# Altium PCB LV_Board.PcbDoc
Units mm, origin at the board's own origin, x right, y up, seen from the top; angles counter-clockwise.
Board outline 81.75 x 75.3 mm, 2 copper layers (Top Layer, Bottom Layer); 6 components, 14 nets, 84 pads, 0 vias.
Unrouted connection lines stored in the file: 22.
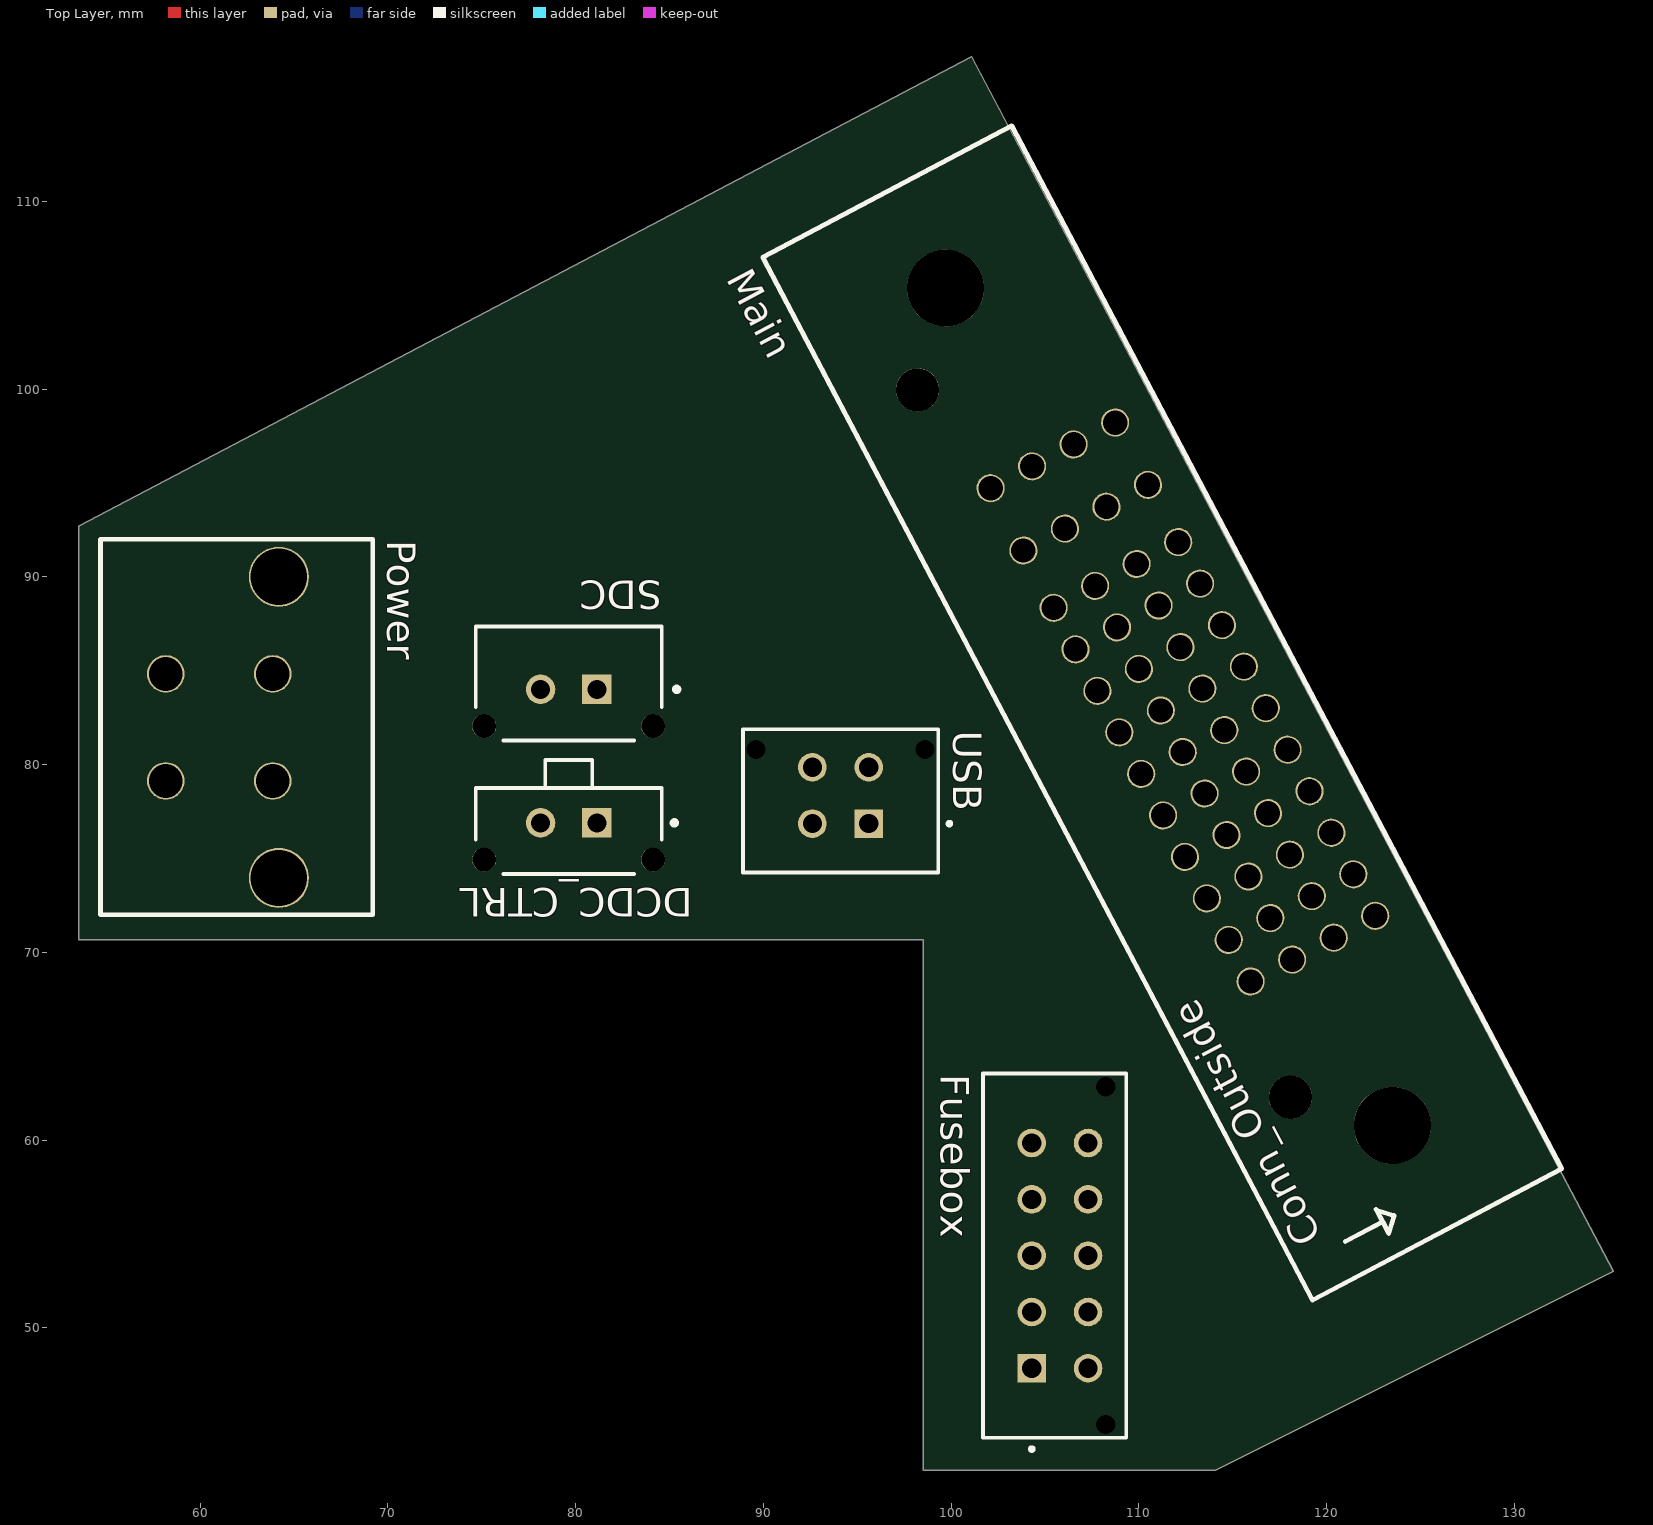
[diagram p0: Top Layer view]
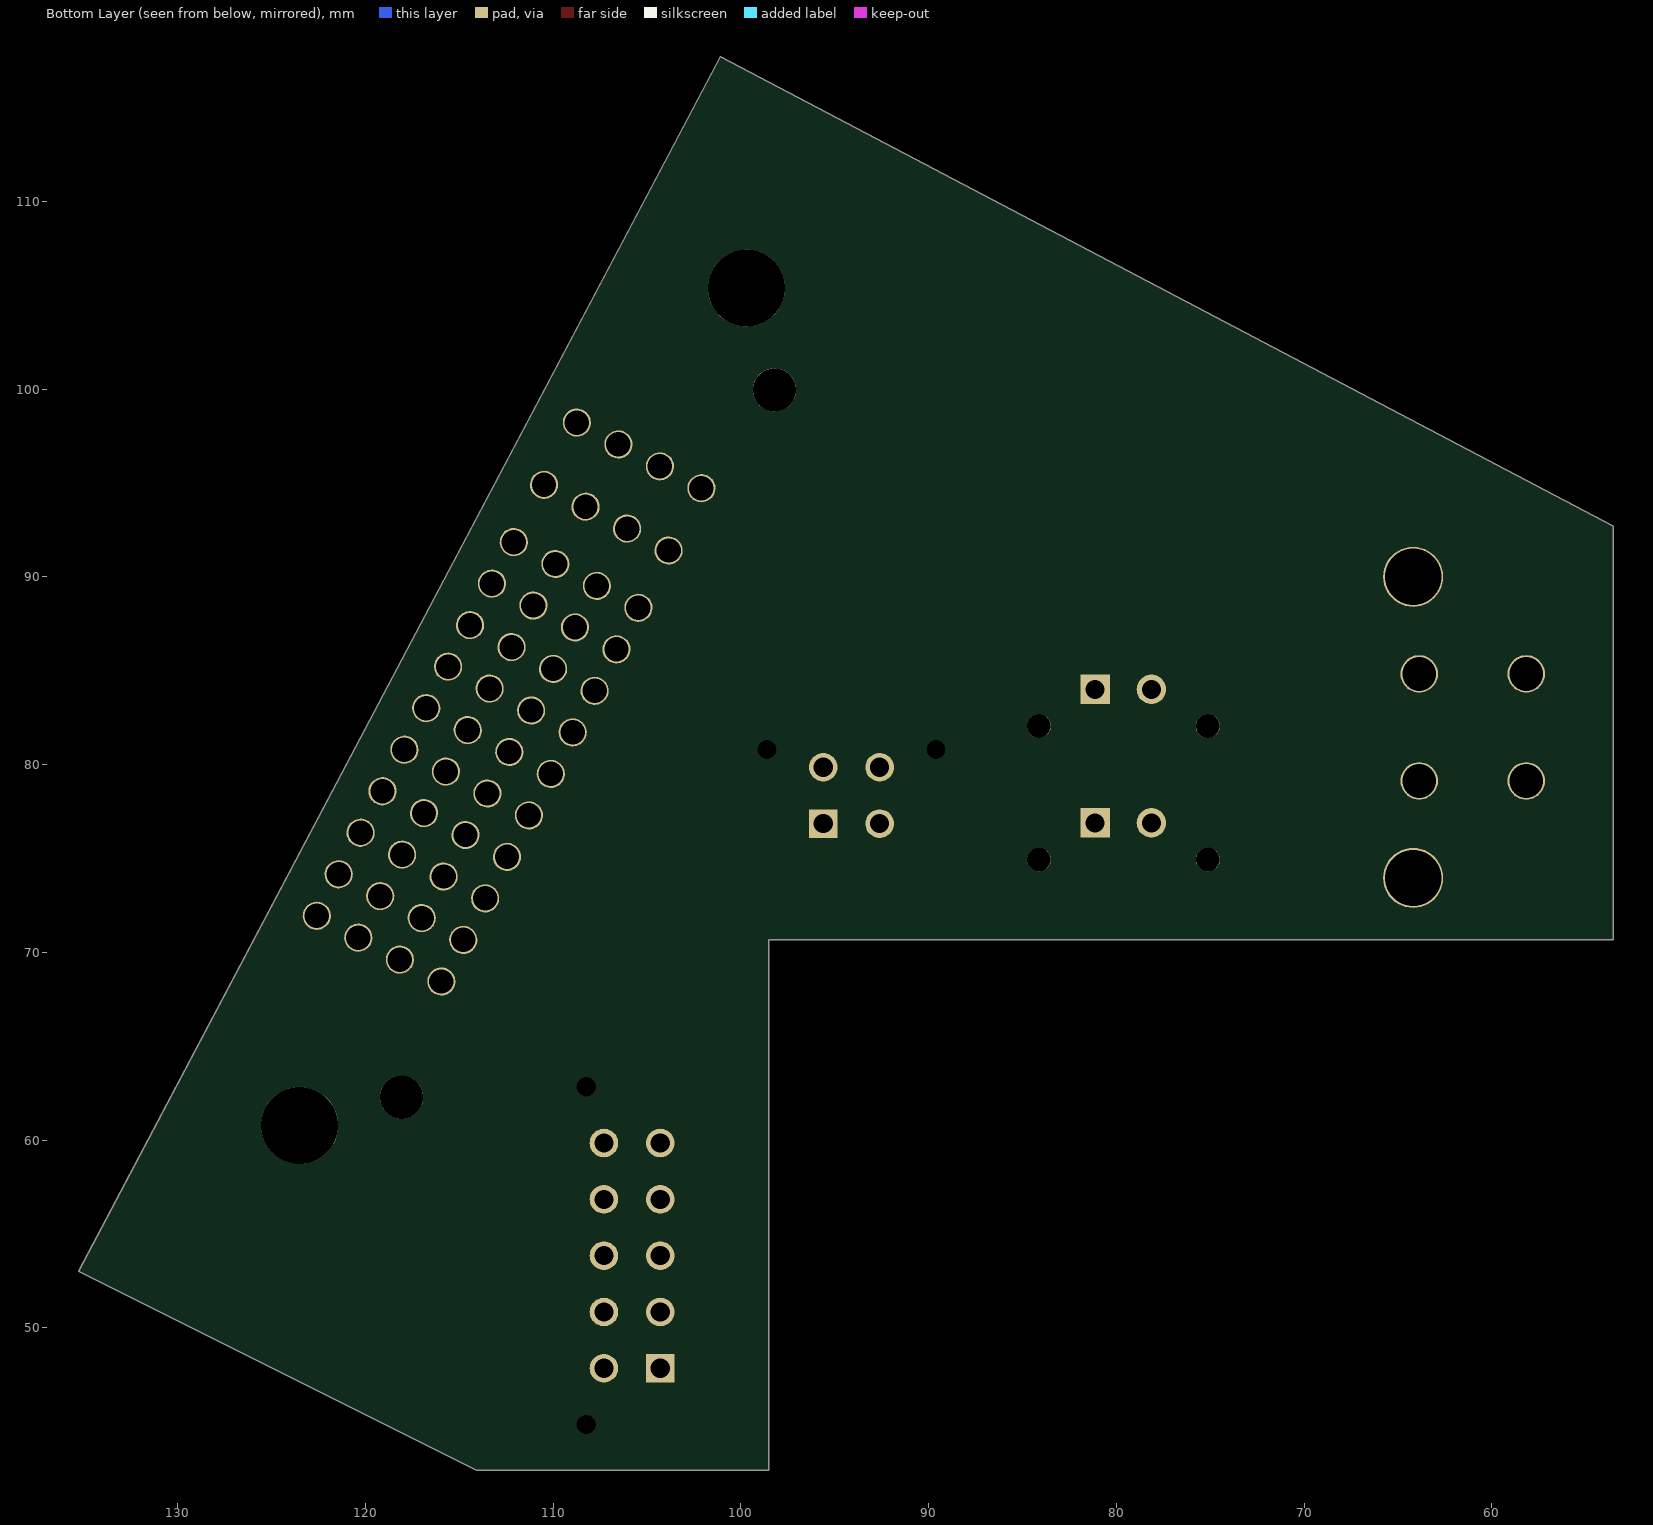
[diagram p1: Bottom Layer view, seen from below]

## Layer stack, top to bottom
Top Solder: solder mask 0.0102, Solder Resist, Dk 3.5
Top Layer: signal copper 0.0356
Dielectric 1: dielectric 0.32, FR-4, Dk 4.8
Bottom Layer: signal copper 0.0356
Bottom Solder: solder mask 0.0102, Solder Resist, Dk 3.5

## Board outline
98.521,42.418 114.071,42.418 135.275,53.025 101.08,117.717 53.521,92.699 53.521,82.668 53.521,70.668 98.521,70.668
cut-out: 0,0 122.146,0 122.708,0
cut-out: 116.601,0 116.305,0 116.866,0 117.163,0
cut-out: 114.826,0 114.265,0 113.968,0 114.53,0
cut-out: 110.109,0 110.406,0 109.844,0 109.548,0
cut-out: 108.196,0 107.634,0 107.337,0 107.899,0
cut-out: 111.632,0 112.193,0 112.49,0 111.928,0
cut-out: 107.786,0 108.347,0 108.644,0 108.083,0
cut-out: 117.416,0 116.854,0 116.557,0 117.119,0
cut-out: 109.364,0 108.802,0 108.506,0 109.067,0
cut-out: 118.022,0 117.726,0 118.287,0 118.584,0
cut-out: 118.641,0 119.203,0 119.499,0 118.938,0
cut-out: 109.971,0 109.674,0 110.235,0 110.532,0
cut-out: 108.267,0 108.828,0 109.125,0 108.564,0
cut-out: 117.77,0 117.473,0 118.034,0 118.331,0
cut-out: 112.011,0 112.572,0 112.869,0 112.307,0
cut-out: 111.884,0 112.446,0 112.742,0 112.181,0
cut-out: 115.263,0 115.824,0 116.121,0 115.56,0
cut-out: 121.275,0 120.978,0 121.539,0 121.836,0
cut-out: 115.389,0 115.951,0 116.247,0 115.686,0
cut-out: 113.488,0 113.784,0 113.223,0 112.926,0
cut-out: 106.731,0 107.027,0 106.466,0 106.169,0
cut-out: 109.983,0 110.28,0 109.718,0 109.421,0
cut-out: 111.758,0 112.319,0 112.616,0 112.055,0
cut-out: 115.698,0 115.995,0 115.433,0 115.136,0
cut-out: 108.941,0 109.238,0 108.676,0 108.379,0
cut-out: 111.013,0 110.716,0 111.277,0 111.574,0
cut-out: 103.927,0 104.223,0 103.662,0 103.365,0
cut-out: 102.198,0 102.494,0 101.933,0 101.636,0
cut-out: 110.886,0 110.59,0 111.151,0 111.448,0
cut-out: 119.329,0 119.626,0 119.064,0 118.768,0
cut-out: 115.205,0 114.644,0 114.347,0 114.909,0
cut-out: 115.812,0 115.515,0 116.077,0 116.374,0
cut-out: 120.497,0 120.794,0 120.233,0 119.936,0
cut-out: 120.668,0 120.106,0 119.81,0 120.371,0
cut-out: 113.911,0 113.349,0 113.053,0 113.614,0
cut-out: 104.705,0 104.143,0 103.846,0 104.408,0
cut-out: 106.915,0 106.353,0 106.057,0 106.618,0
cut-out: 114.094,0 114.656,0 114.953,0 114.391,0
cut-out: 116.431,0 116.992,0 117.289,0 116.728,0
cut-out: 114.518,0 114.221,0 114.782,0 115.079,0
cut-out: 113.74,0 114.037,0 113.476,0 113.179,0
cut-out: 111.7,0 111.139,0 110.842,0 111.404,0
cut-out: 117.599,0 118.161,0 118.457,0 117.896,0
cut-out: 106.137,0 106.434,0 105.872,0 105.576,0
cut-out: 109.996,0 110.557,0 110.854,0 110.293,0
cut-out: 112.8,0 113.361,0 113.658,0 113.097,0
cut-out: 107.508,0 107.211,0 107.773,0 108.069,0
cut-out: 105.298,0 105.001,0 105.562,0 105.859,0

## Design rules (kind name [scope] priority, off if disabled: settings)
BoardOutlineClearance [All] p1: gap=0.2 ignorepadtopadclearanceinfootprint=FALSE // Trace to V-cut >0.4mm
Clearance [All] p1: gap=0.254 ignorepadtopadclearanceinfootprint=TRUE except(0: Arc-Hole Track-Hole SMDPad-Hole THPad-Hole Via-Hole Fill-Hole Poly-Hole Region-Hole Text-Hole; 0.127: Arc-Arc Arc-Track Arc-Fill Arc-Poly Arc-Region Track-Track Track-Fill Track-Poly Track-Region SMDPad-SMDPad; 0.15: Arc-Text Track-Text SMDPad-Text THPad-Text Via-Text Fill-Text Poly-Text Region-Text Text-Text; 0.2: Arc-SMDPad Track-SMDPad SMDPad-Fill SMDPad-Poly SMDPad-Region; 0.33: Arc-THPad Track-THPad THPad-Fill THPad-Poly THPad-Region; 0.5: SMDPad-THPad THPad-THPad THPad-Via)
DiffPairsRouting [All] p1: maxlimit=10 minlimit=0.254 mostfreqgap=0.254 toplayer_minwidth=0.127 toplayer_maxwidth=5 toplayer_prefwidth=0.254 bottomlayer_minwidth=0.127 bottomlayer_maxwidth=5 bottomlayer_prefwidth=0.254 maxuncoupledlength=12.7
Height [All] p1: minheight=0 maxheight=500 prefheight=12.7
HoleSize [All] p1: absolutevalues=TRUE maxlimit=6.3 minlimit=0.2 maxpercent=80.000 minpercent=20.000 // Finished hole size tolerance +0.13/-0.08mm
HoleToHoleClearance [All] p1: gap=0.5 allowstackedmicrovias=TRUE
MatchedLengths [All] p1: tolerance=0.2 checknetsindiffpair=FALSE checkdiffpairvsdiffpair=TRUE checkxsignals=TRUE checkothers=TRUE
MinimumAnnularRing [All] p1: minimumring=0.13 // 1oz Copper
PolygonConnect [All] p1: connectstyle=Relief reliefconductorwidth=0.254 reliefentries=4 polygonreliefangle="90 Angle" airgapwidth=0.254
RoutingVias [All] p1: holewidth=0.711 width=1.27 viastyle="Through Hole" minholewidth=0.3 minwidth=0.6 maxholewidth=0.711 maxwidth=1.27
SolderMaskExpansion [All] p1: expansion=0.05 istentingtop=FALSE
Width [All] p1: maxlimit=4.5 minlimit=0.127 preferedwidth=0.254 minimp=50.000000 maximp=50.000000 favimp=50.000000
26 further rules are at their usual default settings.

## Classes and differential pairs
differential pair USB_D: +USB_D_P -USB_D_N
differential pair CAN: +CAN_P -CAN_N

## Components (designator, comment, footprint, x,y, rotation, side; value= is the part's Value field where it differs from the comment)
DCDC_CTRL "43650-0229" 436500229 79.629,77.216 r0 top
Fusebox "43045-1012" 43045-1012 105.791,53.848 r270 top
Main "Molex48PIN" "Molex 48 Pin Header CMC/CMX" 102.099,94.725 r117.8 top
Power "1720650004" 1720650004 64.191,90.006 r270 top
SDC "436500215" 436500215 79.629,84.328 r0 top
USB "43045-0412" 43045-0412 94.107,78.359 r0 top

## Footprints (in the part's own frame and the unit in brackets; to place one, negate y for a bottom-side part, rotate by r counter-clockwise, add the part's x,y. Pads: shape width x height; smd on the part's side, far side on the other; paste and mask are expansions set on the pad)
43045-0412 [mm]
  rect 1.524x1.524 hole 1.02: 1(1.5,-1.5)
  round 1.524 hole 1.02: 2(-1.5,-1.5) 3(1.5,1.5) 4(-1.5,1.5)
  round 0 hole 1.02 unplated: ""(-4.5,2.44) ""(4.5,2.44)
  silkscreen extent -5.2,-4.1 5.9,3.53, body extent -5.07,-3.97 5.08,4.8, height 9.95
43045-1012 [mm]
  rect 1.524x1.524 hole 1.02: 1(6,-1.5)
  round 1.524 hole 1.02: 2(3,-1.5) 3(0,-1.5) 4(-3,-1.5) 5(-6,-1.5) 6(6,1.5) 7(3,1.5) 8(0,1.5) 9(-3,1.5) 10(-6,1.5)
  round 0 hole 1.02 unplated: ""(-9,2.44) ""(9,2.44)
  silkscreen extent -9.7,-4.1 10.4,3.53, body extent -9.57,-3.97 9.58,4.8, height 9.95
436500215 [mm] "Micro-Fit 3.0 Vertical Header, 3.00mm Pitch, Single Row, 2 Circuits"
  rect 1.57x1.57 hole 1.02 paste-1000 mask+0: 1(1.5,-0.315)
  round 1.57 hole 1.02 paste-1000 mask+0: 2(-1.5,-0.315)
  round 1.27 hole 1.27 unplated paste-1000 mask+0: ""(-4.5,-2.275) ""(4.5,-2.275)
  silkscreen extent -4.95,-3.04 5.88,3.04, body extent -5.24,-3.14 5.24,3.14, height 0.25
436500229 [mm] "Micro-Fit 3.0 Vertical Header, 3.00mm Pitch, Single Row, 2 Circuits"
  rect 1.57x1.57 hole 1.02 paste-1000 mask+0: 1(1.5,-0.315)
  round 1.57 hole 1.02 paste-1000 mask+0: 2(-1.5,-0.315)
  round 1.27 hole 1.27 unplated paste-1000 mask+0: ""(-4.5,-2.275) ""(4.5,-2.275)
  silkscreen extent -4.95,-3.04 5.75,3.04, body extent -5.24,-3.14 5.24,3.14, height 0.25
1720650004 [mm] "Mega-Fit Vertical Header, Through Hole, 5.70mm Pitch, Dual Row, 4 Circuits, 0.38µm"
  round 2 hole 1.8: 1(10.87,-6.025) 2(5.17,-6.025) 3(10.87,-0.325) 4(5.17,-0.325)
  round 3.2 hole 3: NC(0,0) NC(16.04,0)
  silkscreen extent -2,-9.5 18,5, body extent -1.55,-9.37 17.55,4.67, height 15.13
"Molex 48 Pin Header CMC/CMX" [mm]
  round 1.5 hole 1.3: 1(-29.7,0) 2(-27.2,0) 3(-24.7,0) 4(-22.2,0) 5(-19.7,0) 6(-17.2,0) 7(-14.7,0) 8(-12.2,0) 9(-9.7,0) 10(-7.2,0) 11(-3.75,0) 12(0,0) 13(-29.7,-2.5) 14(-27.2,-2.5) 15(-24.7,-2.5) 16(-22.2,-2.5) 17(-19.7,-2.5) 18(-17.2,-2.5) 19(-14.7,-2.5) 20(-12.2,-2.5) 21(-9.7,-2.5) 22(-7.2,-2.5) 23(-3.75,-2.5) 24(0,-2.5) 25(-29.7,-5) 26(-27.2,-5) 27(-24.7,-5) 28(-22.2,-5) 29(-19.7,-5) 30(-17.2,-5) 31(-14.7,-5) 32(-12.2,-5) 33(-9.7,-5) 34(-7.2,-5) 35(-3.75,-5) 36(0,-5) 37(-29.7,-7.5) 38(-27.2,-7.5) 39(-24.7,-7.5) 40(-22.2,-7.5) 41(-19.7,-7.5) 42(-17.2,-7.5) 43(-14.7,-7.5) 44(-12.2,-7.5) 45(-9.7,-7.5) 46(-7.2,-7.5) 47(-3.75,-7.5) 48(0,-7.5)
  round 4.1 hole 4.1: 50(-40,-3.1) 50(10.55,-2.85)
  round 2.3 hole 2.3: 50(-36.15,1) 50(6.45,1)
  silkscreen extent -46.25,-10 16.55,5, body extent -55.14,-47.05 25.44,2.05, height 33.65

## Part data
DCDC_CTRL SDC: "Micro-Fit 3.0 Vertical Header, 3.00mm Pitch, Single Row, 2 Circuits"
  DCDC_CTRL: ComponentLink1Description=Molex, ComponentLink1URL=https://www.molex.com/molex/products/part-detail/pcb_headers/0436500229
Fusebox: "Micro-Fit 3.0 Vertical Header, 3.00mm Pitch, Dual Row, 10 Circuits, with PCB Polarizing Peg, Tin, Glow-Wire Capable, Black"
Power: "Mega-Fit Vertical Header, Through Hole, 5.70mm Pitch, Dual Row, 4 Circuits, 0.38µm"
USB: "Micro-Fit 3.0 Vertical Header, 3.00mm Pitch, Dual Row, 4 Circuits, with PCB Polarizing Peg, Tin, Glow-Wire Capable, Black"

## Nets (pads, with @x,y where several pads share a name; then routed paths per layer and width w, separated by ;. In a path a pad name is that pad's centre, name@x,y a point inside that pad or via, vN(x,y) a via of type N, cw(c..) or ccw(c..) an arc to the next point about the centre after c; other vN are vias at no path point)
24V_In: DCDC_CTRL.2 Fusebox.2 Main.19
24V_Out: Main.11 Main.12 Main.23 Main.24 Power.3 Power.4
CAN_N: Fusebox.4 Main.3 Main.15
CAN_P: Fusebox.5 Main.4 Main.16
GND: Fusebox.1 Power.1 Power.2
Hoop_GND: Fusebox.10 Main.37
LV_Accu_In: DCDC_CTRL.1 Main.32
SC_End_In: Fusebox.6 Main.1
SC_In: Fusebox.8 Main.9
SC_Mid: Fusebox.7 SDC.2
SC_Out: Main.21 SDC.1
TSAL_GRN: Fusebox.9 Main.2
USB_D_N: Main.8 USB.2
USB_D_P: Main.20 USB.3
pads on no net: DCDC_CTRL. Fusebox. Fusebox.3 Main.5 Main.6 Main.7 Main.10 Main.13 Main.14 Main.17 Main.18 Main.22 Main.25 Main.26 Main.27 Main.28 Main.29 Main.30 Main.31 Main.33 Main.34 Main.35 Main.36 Main.38 Main.39 Main.40 Main.41 Main.42 Main.43 Main.44 Main.45 Main.46 Main.47 Main.48 Main.50 Power.NC SDC. USB. USB.1 USB.4

## Silkscreen, mask and mechanical layers (free items; w line width, h text height)
Boardoutline:
  the board outline again, w0.2

## Text inside footprints (layer, text, board x,y; h text height)
Main: Top Overlay "Conn_Outside" at 119.769,54.87 h1.52 r117.8